# Altium PCB PCB2.PcbDoc
Units mil, origin at the board's own origin, x right, y up, seen from the top; angles counter-clockwise.
Board outline 5900 x 3320 mil, 2 copper layers (POWER/SIGNAL, GROUND); 41 components, 40 nets, 141 pads, 23 vias.
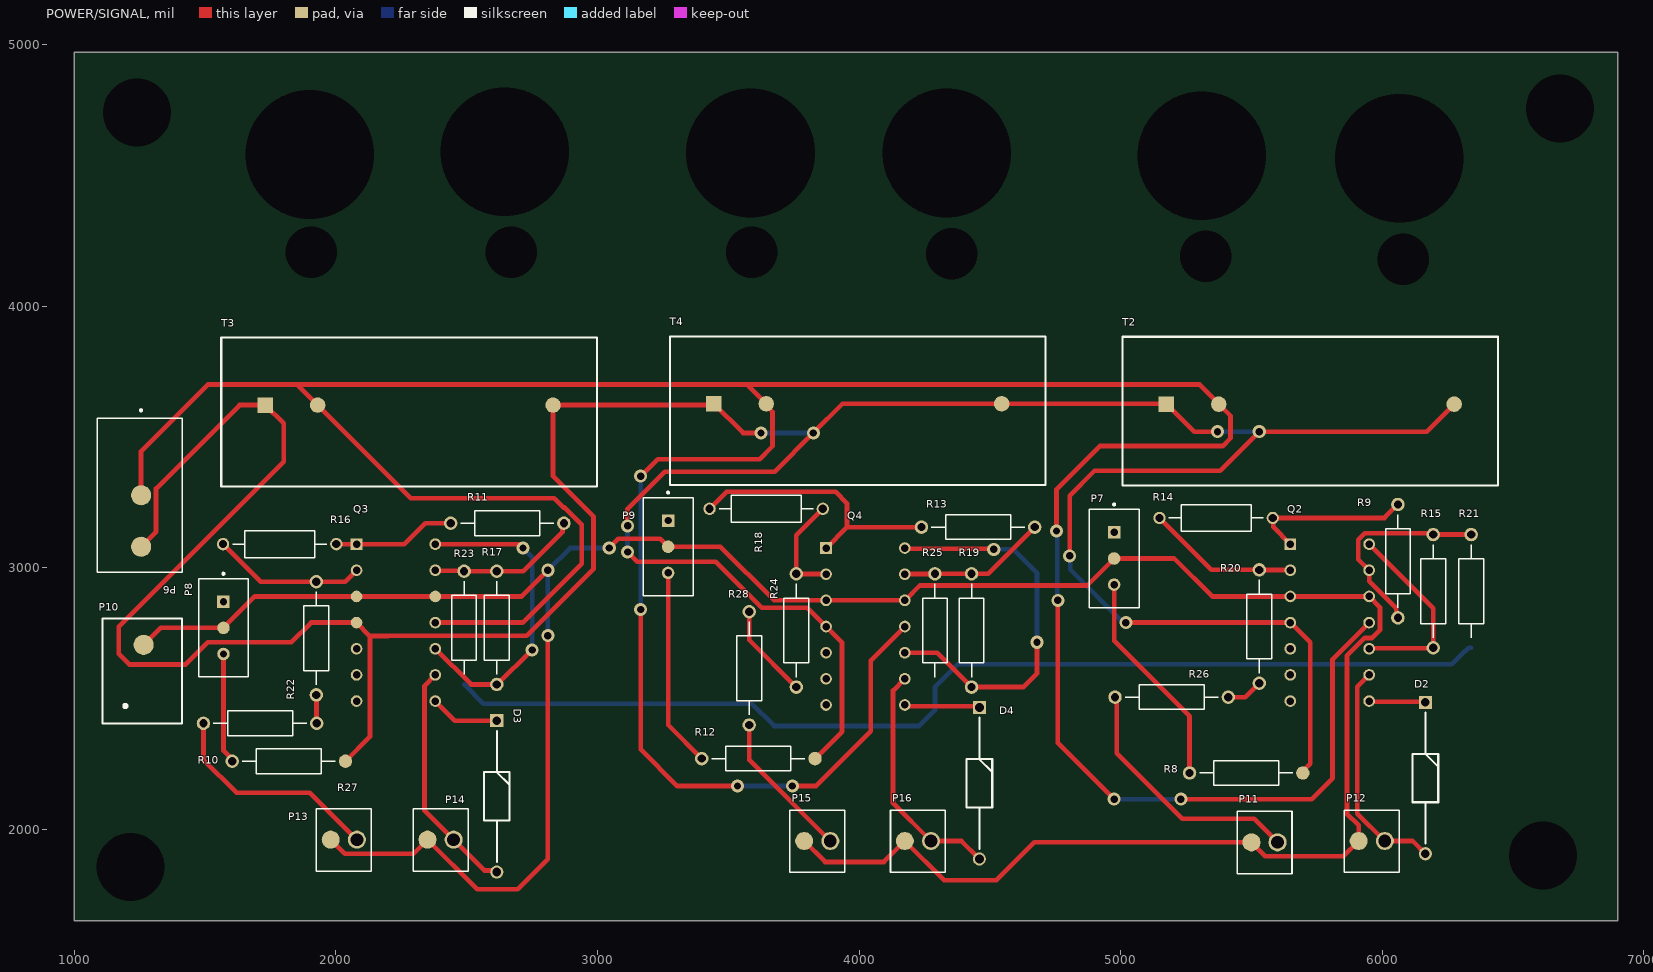
[diagram p0: POWER/SIGNAL view]
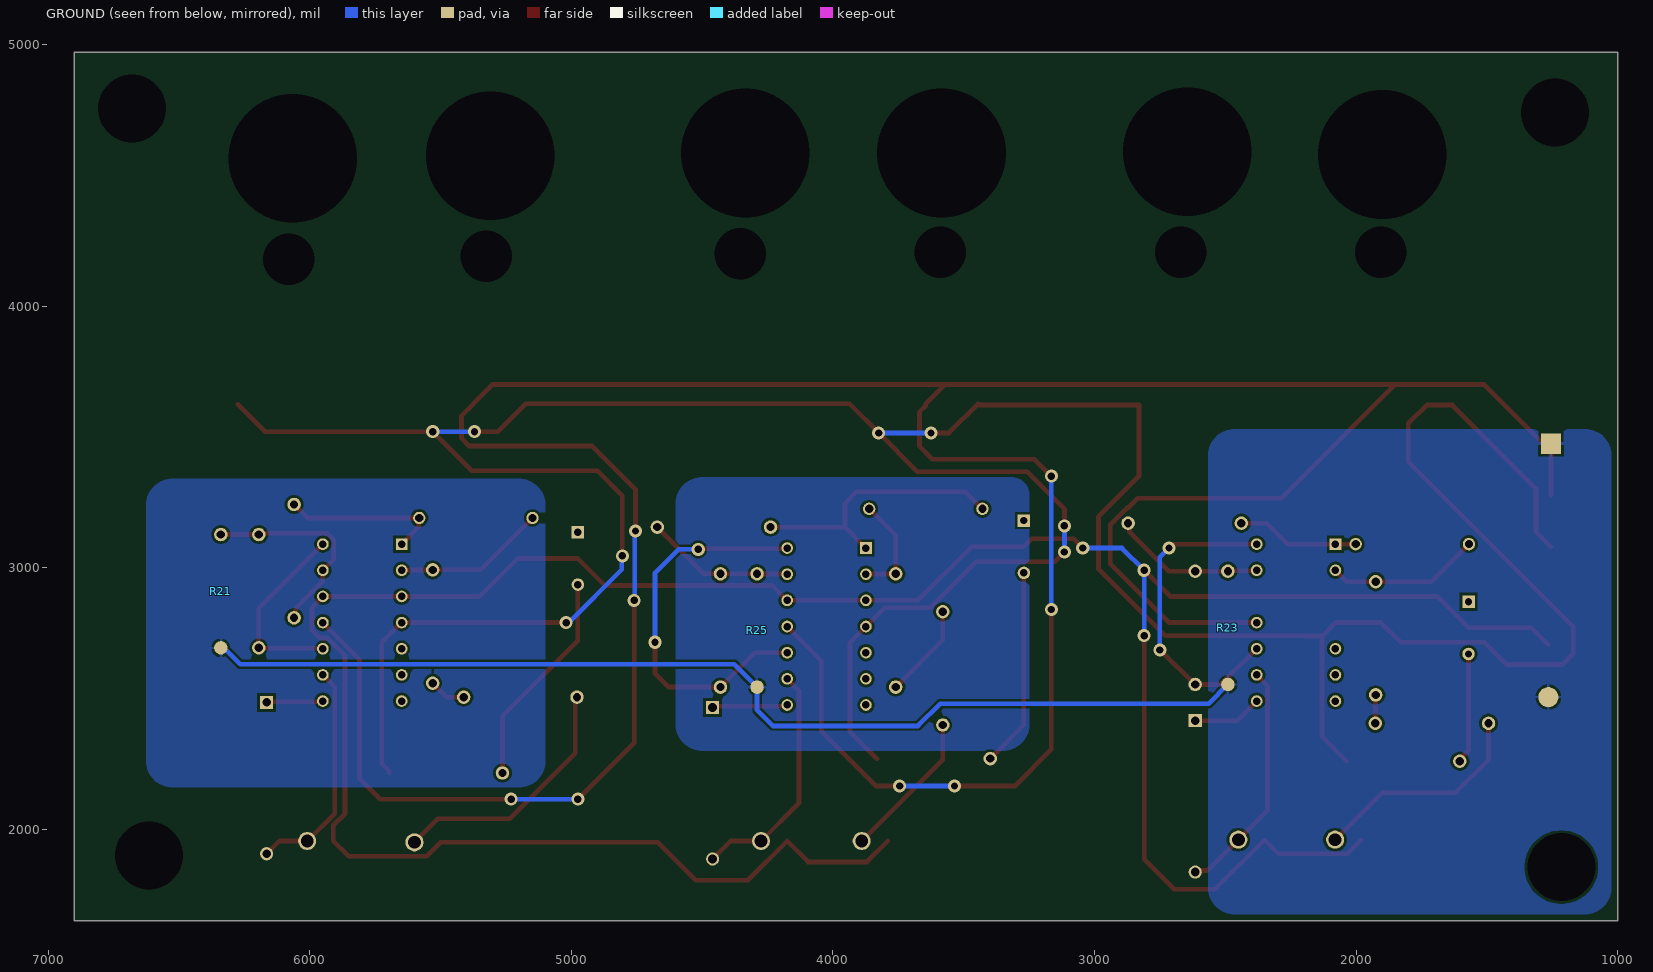
[diagram p1: GROUND view, seen from below]
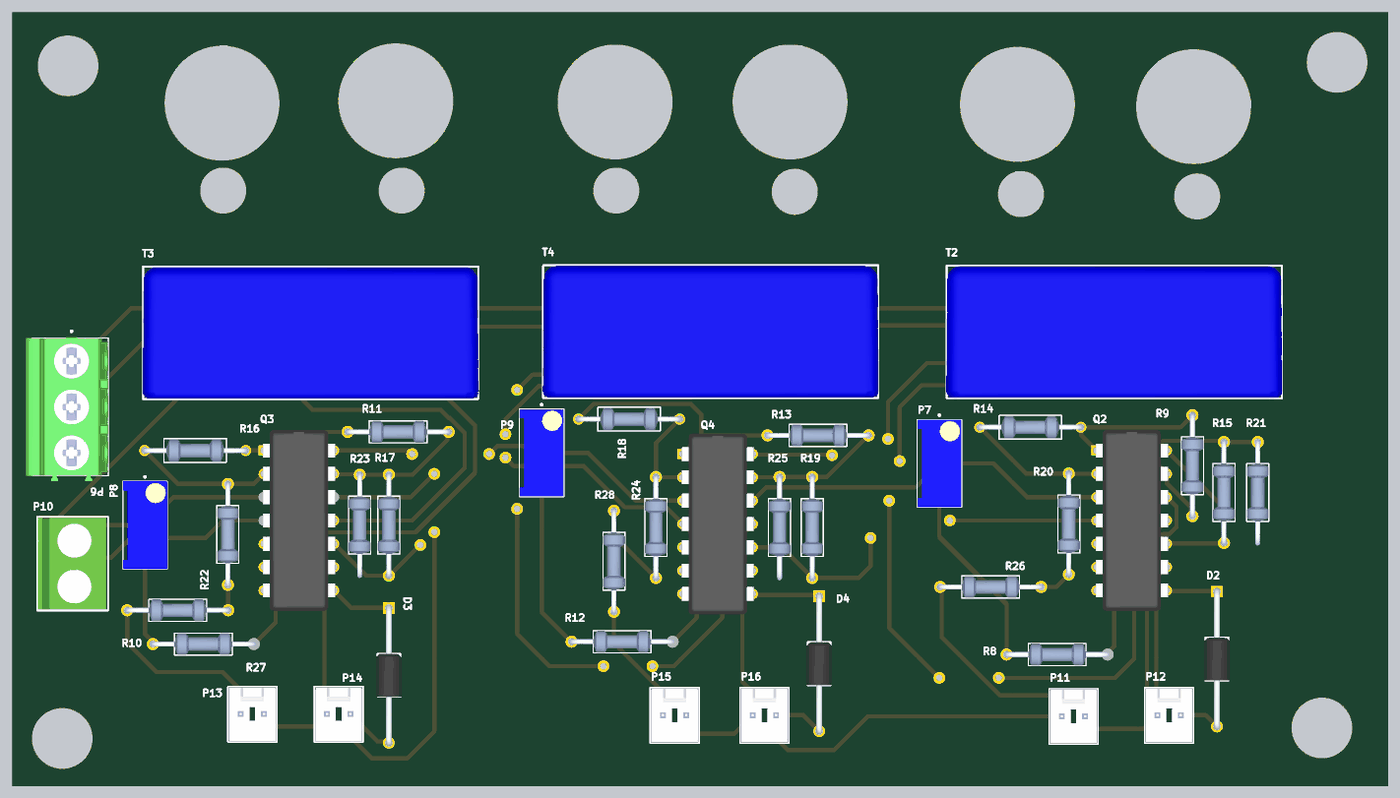
[diagram p2: 3D render of the assembled board from above, using the file's embedded part models]

## Layer stack, top to bottom
Top Solder: solder mask 0.4, Solder Resist, Dk 3.5
POWER/SIGNAL: signal copper 1.4
Dielectric 1: dielectric 12.6, FR-4, Dk 4.8
GROUND: signal copper 1.4
Bottom Solder: solder mask 0.4, Solder Resist, Dk 3.5

## Board outline
1000,1650 6900,1650 6900,4970 1000,4970

## Design rules (kind name [scope] priority, off if disabled: settings)
Clearance [All] p1: gap=10 ignorepadtopadclearanceinfootprint=FALSE
Height [All] p1: minheight=0 maxheight=1100 prefheight=500
HoleSize [All] p1: absolutevalues=TRUE maxlimit=500 minlimit=1 maxpercent=80.000 minpercent=20.000
PolygonConnect [All] p1: connectstyle=Relief reliefconductorwidth=10 reliefentries=4 polygonreliefangle="90 Angle" airgapwidth=10
RoutingVias [All] p1: holewidth=28 width=50 viastyle="Through Hole" minholewidth=28 minwidth=50 maxholewidth=28 maxwidth=50
SilkToSolderMaskClearance [IsPad] p1: minsilkscreentomaskgap=9 clearancetoexposedcopper=TRUE
SolderMaskExpansion [All] p1: expansion=0 istentingtop=FALSE
SupplyNets "Schematic Supply Nets_3" [InNet('+15')] p1: voltage=0.000
SupplyNets "Schematic Supply Nets_2" [InNet('+5')] p2: voltage=0.000
SupplyNets "Schematic Supply Nets_1" [InNet('GND')] p3: voltage=0.000
SupplyNets "Schematic Supply Nets" [InNet('-15')] p4: voltage=0.000
Width [All] p1: maxlimit=18 minlimit=18 preferedwidth=18 minimp=50.000000 maximp=50.000000 favimp=50.000000
27 further rules are at their usual default settings.

## Components (designator, comment, footprint, x,y, rotation, side; value= is the part's Value field where it differs from the comment)
D2 "DIODE" Diode 6155,2190 r270 top
D3 "DIODE" Diode 2605,2120 r270 top
D4 "DIODE" Diode 4450,2170 r270 top
P6 "3 PIN JACK" "3 PIN JACK" 1242.68,3277.13 r270 top
P7 "Potentiometer" Potentiometer 4975,3035 r270 top
P8 "Potentiometer" Potentiometer 1570,2770 r270 top
P9 "Potentiometer" Potentiometer 3270,3080 r270 top
P10 "2 PIN JACK" "2 PIN JACK" 1265,2610 r90 top
P11 "2 Pin" "2 PIN" 5550,1955 r0 top
P12 "2 Pin" "2 PIN" 5960,1960 r0 top
P13 "2 Pin" "2 PIN" 2030,1965 r0 top
P14 "2 Pin" "2 PIN" 2400,1965 r0 top
P15 "2 Pin" "2 PIN" 3840,1960 r0 top
P16 "2 Pin" "2 PIN" 4225,1960 r0 top
Q2 "TL084CN" TL084CN#1 5800,2815 r0 top
Q3 "TL084CN" TL084CN#2 2230,2815 r0 top
Q4 "TL084CN" TL084CN#1 4025,2800 r0 top
R8 "47" 47 5465,2215 r0 top
R9 "7.9K" 7.90K#1 6065,3020 r270 top
R10 "47" 47 1805,2260 r0 top
R11 "7.9K" 7.90K#1 2660,3175 r0 top
R12 "47" 47 3600,2270 r0 top
R13 "7.9K" 7.90K#1 4460,3160 r0 top
R14 "3.48K" 3.48K 5360,3205 r180 top
R15 "9.94K" 9.94K 6195,2920 r90 top
R16 "3.48K" 3.48K 1780,3105 r180 top
R17 "9.94K" 9.94K 2615,2780 r90 top
R18 "3.48K" 3.48K 3650,3210 r0 top
R19 "9.94K" 9.94K 4430,2770 r90 top
R20 "0.97K" 0.97K 5525,2795 r90 top
R21 "7.9K" 7.90K#2 6335,2915 r90 top
R22 "0.97K" 0.97K 1920,2750 r90 top
R23 "7.9K" 7.90K#2 2485,2775 r90 top
R24 "0.97K" 0.97K 3755,2780 r90 top
R25 "7.9K" 7.90K#2 4285,2765 r90 top
R26 "8.97K" 8.97K 5195,2510 r180 top
R27 "8.97K" 8.97K 1710,2410 r180 top
R28 "8.97K" 8.97K 3575,2615 r270 top
T2 "Transducer" Transducer 5680,3548.43 r0 top
T3 "Transducer" Transducer 2235,3545 r0 top
T4 "Transducer" Transducer 3950,3550 r0 top

## Footprints (in the part's own frame and the unit in brackets; to place one, negate y for a bottom-side part, rotate by r counter-clockwise, add the part's x,y. Pads: shape width x height; smd on the part's side, far side on the other; paste and mask are expansions set on the pad)
0.97K [mil]
  round 51.5 hole 31.5: 1(-236.54,-5) 2(196.54,-5)
  silkscreen extent -198,-52 158,42, body extent -247,-52 207,42, height 94
"2 PIN" [mil]
  round 69 hole 49 mask+4.02: 1(50,-5)
  round 69 smd mask+4.02: 2(-50,-5)
  silkscreen extent -105,-125 105,113, body extent -100,-120 100,108, height 461
"2 PIN JACK" [mm]
  round 1.95 smd far side: 1(-2.667,0)
  round 1.95 smd: 2(2.413,0)
  silkscreen extent -5.23,-3.72 4.97,3.98, body extent -5.13,-3.56 4.87,3.94, height 11.5
"3 PIN JACK" [mm]
  rect 1.95x1.95 smd far side: 1(-4.993,0.313)
  round 1.95 smd: 2(0.007,0.313) 3(5.007,0.313)
  silkscreen extent -8.34,-3.94 7.51,4.31, body extent -7.59,-4.69 8.08,4.31, height 11.55
3.48K [mm]
  round 1.2 hole 0.8: 1(-5.627,0.381) 2(5.373,0.381)
  silkscreen extent -4.71,-0.92 4.45,1.68, body extent -5.9,-0.82 5.65,1.58, height 2.4
7.90K#1 [mil]
  round 51.5 hole 31.5: 1(-221.54,-5) 2(211.54,-5)
  silkscreen extent -183,-52 173,42, body extent -232,-52 222,42, height 94
7.90K#2 [mil]
  round 51.5 smd far side: 1(-221.54,-5)
  round 51.5 hole 31.5: 2(211.54,-5)
  silkscreen extent -183,-52 173,42, body extent -232,-52 222,42, height 94
8.97K [mm]
  round 1.308 hole 0.8: 1(-5.5,0.127) 2(5.5,0.127)
  silkscreen extent -4.53,-1.07 4.53,1.33, body extent -5.77,-1.07 5.77,1.33, height 2.4
9.94K [mm]
  round 1.308 hole 0.8: 1(-5.754,0) 2(5.246,0)
  silkscreen extent -4.78,-1.2 4.27,1.2, body extent -6.03,-1.2 5.52,1.2, height 2.4
47 [mm]
  round 1.308 hole 0.8: 1(-5.119,0)
  round 1.308 smd: 2(5.881,0)
  silkscreen extent -4.15,-1.2 4.91,1.2, body extent -5.39,-1.2 6.16,1.2, height 2.4
Diode [mm]
  rect 1.275x1.275 / inner round 1.275 / far side rect 1.275x1.275 hole 0.85: 1(-7.493,0.254)
  round 1.275 hole 0.85: 2(7.207,0.254)
  silkscreen extent -6.51,-1 6.22,1.5, body extent -7.82,-1.09 7.53,1.59, height 2.7
Potentiometer [mm]
  rect 1.218x1.218 / inner round 1.218 / far side rect 1.218x1.218 hole 0.71: 1(-2.54,0)
  round 1.218 smd: 2(0,0)
  round 1.218 hole 0.71: 3(2.54,0)
  silkscreen extent -5.35,-2.41 4.76,2.42, body extent -4.76,-2.41 4.76,2.42, height 11.55
TL084CN#1 [mm]
  rect 1.13x1.13 / inner round 1.13 / far side rect 1.13x1.13 hole 0.73: 1(-3.843,6.985)
  round 1.13 hole 0.73: 2(-3.843,4.445) 3(-3.843,1.905) 4(-3.843,-0.635) 5(-3.843,-3.175) 6(-3.843,-5.715) 7(-3.843,-8.255) 8(3.81,-8.255) 9(3.81,-5.715) 10(3.81,-3.175) 11(3.81,-0.635) 12(3.81,1.905) 13(3.81,4.445) 14(3.81,6.985)
  body extent -3.94,-10.48 3.94,9.21, height 5.82
TL084CN#2 [mm]
  rect 1.13x1.13 / inner round 1.13 / far side rect 1.13x1.13 hole 0.73: 1(-3.843,6.985)
  round 1.13 hole 0.73: 2(-3.843,4.445) 5(-3.843,-3.175) 6(-3.843,-5.715) 7(-3.843,-8.255) 8(3.81,-8.255) 9(3.81,-5.715) 10(3.81,-3.175) 11(3.81,-0.635) 13(3.81,4.445) 14(3.81,6.985)
  round 1.13 smd: 3(-3.843,1.905) 4(-3.843,-0.635) 12(3.81,1.905)
  body extent -3.94,-10.48 3.94,9.21, height 5.82
Transducer [mm]
  rect 1.5x1.5 smd: 1(-12.827,1.945)
  round 1.5 smd: 2(-7.747,1.945) 3(15.113,1.945)
  silkscreen extent -17.11,-5.95 19.39,8.49, body extent -17.16,-5.91 19.44,8.44, height 27.2

## Part data
D2 D3 D4: "1N4007S"
P11 P12 P13 P14 P15 P16: "22272021"
R8 R10 R12: "MFR-25FRF52-47R"
R9 R11 R13 R21 R23 R25: "MFR-25FBF52-7K87"
R14 R16 R18: "MFR-25FBF52-3K48"
R15 R17 R19: "MFR-25FTE52-9K76"
R20 R22 R24: "MFR-25FRF52-976R"
R26 R27 R28: "MFR-25FBF52-8K87"
T2 T3 T4: "LA55-P"

## Free pads (board coordinates)
  round 60 hole 492.13: 1(1900,4580) 1(2645,4590) 1(3585,4585) 1(4335,4585) 1(5310,4575) 1(6065,4565)
  round 60 hole 259.84: 3(1215,1855) 3(1240,4740) 3(6615,1900) 3(6680,4755)
  round 60 hole 196.85: 4(1905,4205) 4(2670,4205) 4(3590,4205) 4(4355,4200) 4(5325,4190) 4(6080,4180)

## Via types
v1: diameter 50, hole 28, POWER/SIGNAL to GROUND, 23 vias

## Nets (pads, with @x,y where several pads share a name; then routed paths per layer and width w, separated by ;. In a path a pad name is that pad's centre, name@x,y a point inside that pad or via, vN(x,y) a via of type N, cw(c..) or ccw(c..) an arc to the next point about the centre after c; other vN are vias at no path point)
+5: P7.2 P8.2 P9.2 P10.2 P11.2 P12.2 P13.2 P14.2 P15.2 P16.2 Q2.3 Q2.12 Q3.3 Q3.12 Q4.3 Q4.12 | length 10579.1
  POWER/SIGNAL w18: P10.2 1330,2770 P8.2 1690,2890 Q3.3 Q3.12 2710,2890 v1(2810,2990) ; P13.2 2033.5,1906.5 2296.5,1906.5 P14.2 2540,1770 2695,1770 2810,1885 v1(2810,2740) ; v1(3045,3075) 3080,3110 3240,3110 P9.2 3469.82,3080 3674.82,2875 Q4.3 Q4.12 Q4.12@4181.88,2881.88 ; P15.2 3870,1875 4095,1875 P16.2 4325,1805 4525,1805 4670,1950 P11.2 5553.5,1896.5 5851.5,1896.5 P12.2 5910,2015 5865,2060 5865,2663.33 5932.92,2731.24 5961.24,2731.24 5991.24,2761.24 5991.24,2848.76 Q2.12 Q2.3 5350,2890 5205,3035 P7.2 4871.79,2931.79 4231.79,2931.79 Q4.12@4181.88,2881.88 ; Q4.12@4183.69,2880.07 Q4.12@4181.88,2881.88
  GROUND w18: v1(2810,2740) v1(2810,2990) 2895,3075 v1(3045,3075)
+15: P6.3 Q2.4 Q3.4 Q4.4 R8.2 R10.2 R12.2 T2.1 T2.3 T3.1 T3.3 T4.1 T4.3 | length 13977.3
  POWER/SIGNAL w18: P6.3 1312.39,3137.39 1312.39,3302.39 1631.57,3621.57 T3.1 1800,3551.57 1800,3405 1170,2775 1170,2670 1210,2630 1425,2630 1510,2715 1830,2715 1905,2790 Q3.4 2130,2738.7 ; R10.2 2130,2353.46 2130,2738.7 ; v1(3115,3060) 3152.02,3022.98 3451.84,3022.98 3627.82,2847 3801.7,2847 Q4.4 3935,2713.7 3935,2373.46 R12.2 ; v1(3115,3160) 3115,3225 3256.94,3366.94 3676.94,3366.94 v1(3825,3515) 3936.57,3626.57 T4.3 5175,3626.57 5281.57,3520 v1@5360,3520 ; v1(3625,3515) 3556.57,3515 T4.1 3440,3621.57 T3.3 2830,3350 2985,3195 2985,2995 2729.35,2739.35 2200.65,2739.35 2200,2738.7 2130,2738.7 ; v1(4805,3045) 4805,3275 4900,3370 5380,3370 v1(5530,3520) 6170,3520 T2.3 ; v1(5020,2790) Q2.4 5649.66,2790 5725,2714.66 5725,2251.13 5696.54,2222.67 R8.2
  GROUND w18: v1(3115,3060) v1(3115,3160) ; v1(3625,3515) v1(3825,3515) ; v1(4805,3045) 4807,3043 4807,2993 v1@5010,2790 ; v1(5370,3520) v1(5530,3520)
-15: P6.2 Q2.11 Q3.11 Q4.11 T2.2 T3.2 T4.2 | length 13580.1
  POWER/SIGNAL w18: P6.2 1255,3445 1510,3700 1851.57,3700 ; Q3.11 2714.46,2790 2940,3015.54 2940,3164.82 2874.86,3229.95 2870.05,3229.95 2835,3265 2286.57,3265 T3.2 1851.57,3700 ; v1(3165,2840) 3165,2305 3305,2165 v1(3535,2165) ; v1(3165,3350) 3230,3415 3620,3415 3669,3464 3669,3595.5 3645,3619.5 T4.2 3571.57,3700 ; v1(3745,2165) 3835,2165 4045,2375 4045,2645 Q4.11 ; v1(4755,3140) 4755,3300 4920,3465 5390,3465 5420,3495 5420,3580 T2.2 ; v1(4760,2875) 4760,2330 v1(4975,2115) ; v1(5230,2115) 5730,2115 5810,2195 5810,2650 Q2.11 ; T2.2@5375,3626.57 5301.57,3700 3571.57,3700 ; 1851.57,3700 3571.57,3700
  GROUND w18: v1(3165,2840) v1(3165,3350) ; v1(3535,2165) v1(3745,2165) ; v1(4755,3140) 4757.5,3137.5 4757.5,2877.5 v1(4760,2875) ; v1(4975,2115) v1(5230,2115)
GND: P6.1 P10.1 R21.1 R23.1 R25.1 | length 4091.1
  GROUND w18: R23.1 2563.46,2480 3590,2480 3675,2395 4230,2395 4290,2455 R25.1 4377.78,2631.24 6266.24,2631.24 6314.93,2679.93 6317.41,2679.93 6330.94,2693.46 R21.1
NetD1_1: 
NetD1_2: 
NetD2_1: D2.1 Q2.8 | length 217.1
  POWER/SIGNAL w18: Q2.8 5952.5,2487.5 6162.5,2487.5 D2.1
NetD2_2: D2.2 P12.1 Q2.9 | length 872.3
  POWER/SIGNAL w18: Q2.9 5905,2545 5905,2060 P12.1 6116.26,1955 D2.2
NetD3_1: D3.1 Q3.8 | length 266.1
  POWER/SIGNAL w18: Q3.8 2455,2415 D3.1
NetD3_2: D3.2 P14.1 Q3.9 | length 909.4
  POWER/SIGNAL w18: Q3.9 2338.76,2548.76 2338.76,2071.24 P14.1 2567.58,1842.42 2608.84,1842.42 D3.2
NetD4_1: D4.1 Q4.8 | length 289.1
  POWER/SIGNAL w18: Q4.8 4180,2470 4455,2470 D4.1
NetD4_2: D4.2 P16.1 Q4.9 | length 912.2
  POWER/SIGNAL w18: Q4.9 4130,2530 4130,2100 P16.1 4391.26,1955 D4.2
NetP3_1: 
NetP5_3: 
NetP7_3: P7.3 R8.1 | length 839.5
  POWER/SIGNAL w18: P7.3 4975,2719.71 5263.46,2431.25 R8.1
NetP8_3: P8.3 R10.1 | length 423.9
  POWER/SIGNAL w18: P8.3 1570,2301.13 1603.46,2267.67 R10.1
NetP9_3: P9.3 R12.1 | length 763.2
  POWER/SIGNAL w18: P9.3 3270,2398.46 R12.1
NetP11_1: P11.1 R26.2 | length 973.5
  POWER/SIGNAL w18: R26.2 4984.87,2498.59 4984.87,2477.83 4985,2477.71 4985,2290 5235,2040 5510,2040 P11.1
NetP13_1: P13.1 R27.2 | length 852
  POWER/SIGNAL w18: R27.2 1493.46,2266.54 1620,2140 1900,2140 P13.1
NetP15_1: P15.1 R28.2 | length 571.9
  POWER/SIGNAL w18: R28.2 3580,2265 P15.1
NetQ1_1: 
NetQ1_2: 
NetQ1_10: 
NetQ1_13: 
NetQ2_1: Q2.1 R9.1 R14.1 | length 627.6
  POWER/SIGNAL w18: Q2.1 5582.91,3155.79 5582.91,3188.62 R14.1 6008.46,3190 R9.1
NetQ2_2: Q2.2 R14.2 R20.2 | length 583.1
  POWER/SIGNAL w18: R14.2 5346.93,2991.54 R20.2 5530.77,2990.77 5647.93,2990.77 Q2.2
NetQ2_10: Q2.10 Q2.14 R15.1 | length 744.5
  POWER/SIGNAL w18: Q2.10 5951.73,2691.73 6193.27,2691.73 R15.1 6195,2845 Q2.14
NetQ2_13: Q2.13 R9.2 R15.2 R21.2 | length 804.5
  POWER/SIGNAL w18: R9.2 6053.97,2814.5 6053.97,2844.36 5950,2948.33 Q2.13 5908.76,3031.24 5908.76,3107.08 5932.92,3131.24 6190.29,3131.24 R15.2 R21.2
NetQ3_1: Q3.1 R11.1 R16.1 | length 470.1
  POWER/SIGNAL w18: R16.1 Q3.1 2260.96,3090 2340.96,3170 R11.1
NetQ3_2: Q3.2 R16.2 R22.2 | length 587.7
  POWER/SIGNAL w18: R16.2 1711.93,2946.54 R22.2 2035.24,2946.54 Q3.2
NetQ3_10: Q3.10 Q3.14 R17.1 | length 1226.7
  POWER/SIGNAL w18: Q3.10 2516.54,2553.46 R17.1 2616.73,2553.46 2748.27,2685 v1(2750,2685) ; Q3.14 2700,3090 v1(2715,3075)
  GROUND w18: v1(2715,3075) 2750,3040 v1(2750,2685)
NetQ3_13: Q3.13 R11.2 R17.2 R23.2 | length 585.6
  POWER/SIGNAL w18: Q3.13 2381.73,2988.27 2488.27,2988.27 R23.2 R17.2 2716.54,2986.54 2866.47,3136.47 2866.47,3164.93 R11.2
NetQ4_1: Q4.1 R13.1 R18.1 | length 1059.5
  POWER/SIGNAL w18: R18.1 3493.46,3290 3910,3290 3953.7,3246.3 3953.7,3155 ; Q4.1 3953.7,3155 ; R13.1 3953.7,3155
NetQ4_2: Q4.2 R18.2 R24.2 | length 404.9
  POWER/SIGNAL w18: R18.2 3760,3123.46 R24.2 3760.77,2975.77 3872.93,2975.77 Q4.2
NetQ4_10: Q4.10 Q4.14 R19.1 | length 1510.2
  POWER/SIGNAL w18: Q4.10 4298.46,2675 R19.1 4628.46,2543.46 4680,2595 v1(4680,2715) ; Q4.14 4177.5,3072.5 4512.5,3072.5 v1(4515,3070)
  GROUND w18: v1(4515,3070) 4590,3070 4680,2980 v1(4680,2715)
NetQ4_13: Q4.13 R13.2 R19.2 R25.2 | length 571.1
  POWER/SIGNAL w18: Q4.13 4175.77,2975.77 4289.23,2975.77 R25.2 R19.2 4493.07,2976.54 R13.2
NetR3_1: 
NetR20_1: R20.1 R26.1 | length 140.6
  POWER/SIGNAL w18: R26.1 5476.54,2505 R20.1
NetR22_1: R22.1 R27.1 | length 109.1
  POWER/SIGNAL w18: R22.1 1925.77,2512.7 1925.77,2405.77 R27.1
NetR24_1: R24.1 R28.1 | length 362.6
  POWER/SIGNAL w18: R28.1 3580,2723.46 R24.1
pads on no net: P7.1 P8.1 P9.1 Q2.5 Q2.6 Q2.7 Q3.5 Q3.6 Q3.7 Q4.5 Q4.6 Q4.7

## Polygon pours and split planes (outlines as drawn)
GND on GROUND "GND_L02_P002" (solid, pour order 2): 5100,3240 cw(c5200,3240) 5200,3340 6525,3340 cw(c6525,3240) 6625,3240 6625,2260 cw(c6525,2260) 6525,2160 5200,2160 cw(c5200,2260) 5100,2260
GND on GROUND "GND_L02_P001" (solid, pour order 1): 3250,3280 cw(c3315,3280) 3315,3345 4500,3345 cw(c4500,3245) 4600,3245 4600,2400 cw(c4500,2400) 4500,2300 3350,2300 cw(c3350,2400) 3250,2400
GND on GROUND "GND_L02_P000" (solid, pour order 0): 1025,3430 cw(c1125,3430) 1125,3530 2465,3530 cw(c2465,3430) 2565,3430 2565,1775 cw(c2465,1775) 2465,1675 1125,1675 cw(c1125,1775) 1025,1775 1025,1900